# Altium PCB 电机驱动板-V5.0.PcbDoc (part 3 of 3)
Units mil, origin at the board's own origin, x right, y up, seen from the top; angles counter-clockwise.
Board outline 4724.41 x 4330.71 mil, 4 copper layers (Top Layer, NET-A, GND-A, Bottom Layer); 312 components, 201 nets, 977 pads, 515 vias.
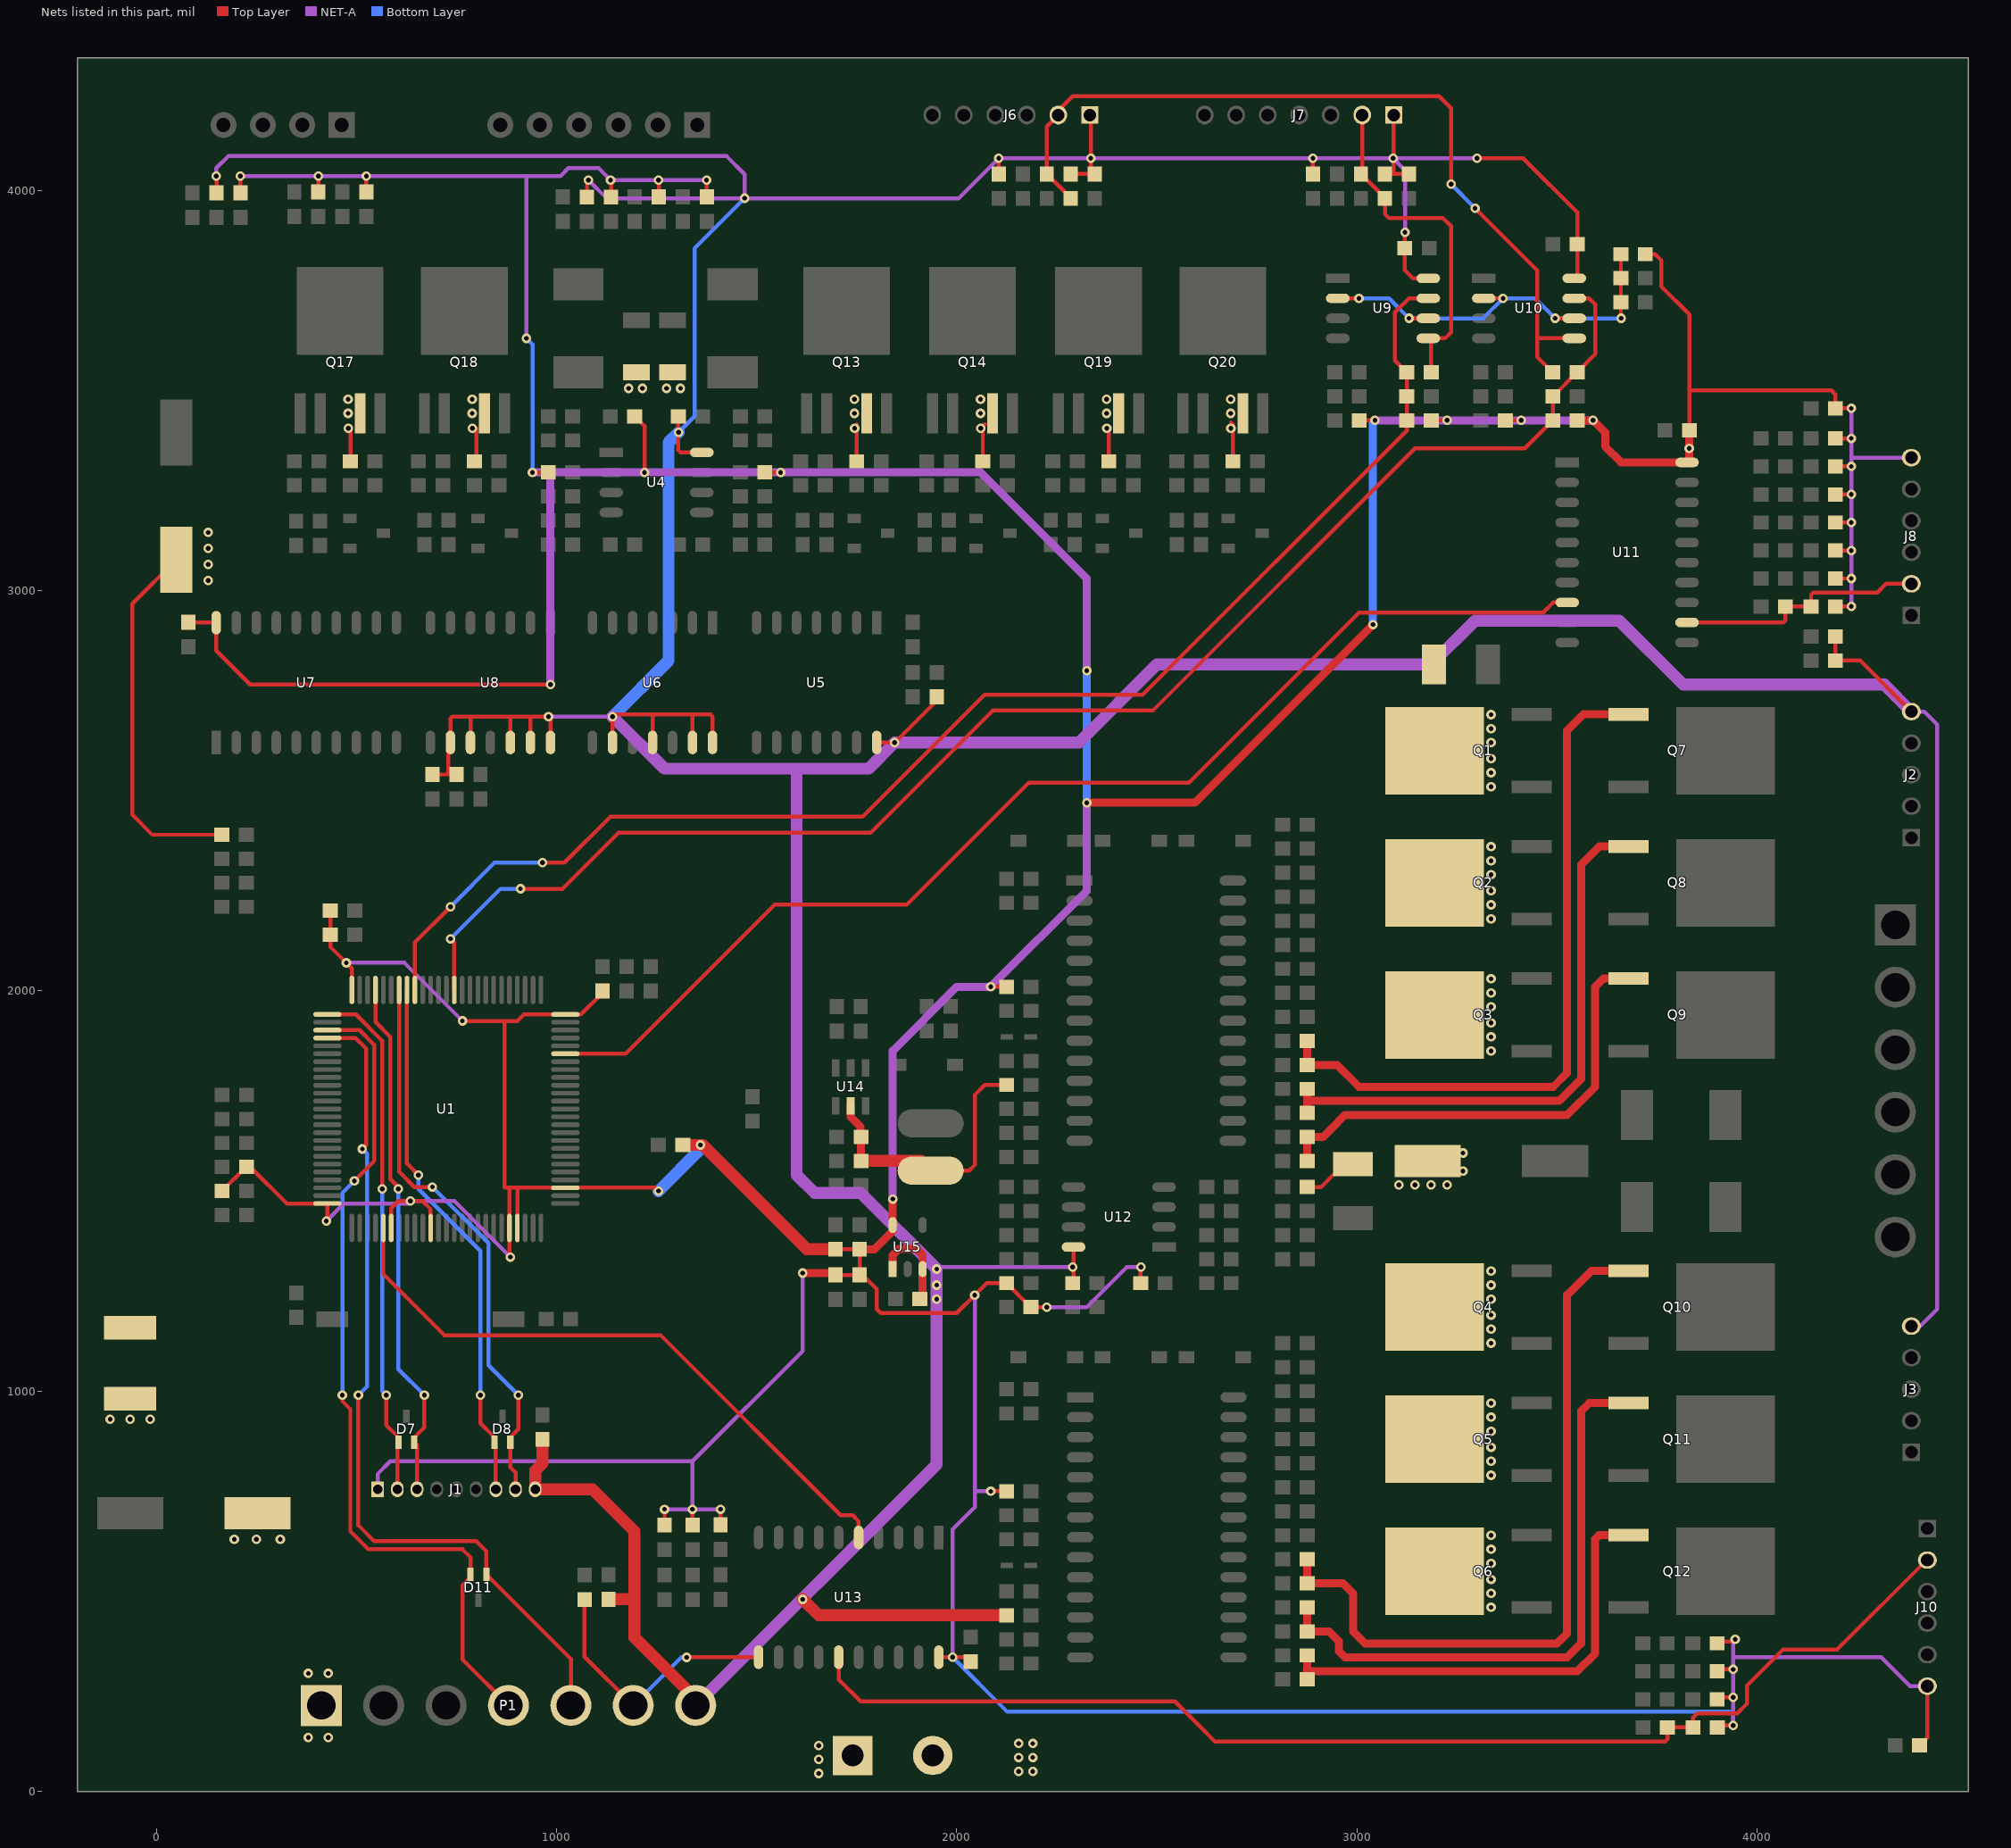
[diagram p5: the nets of this part, all layers, seen from the top]

## Via types
v1: diameter 23.62, hole 11.81, Top Layer to Bottom Layer, tented both sides, 513 vias
v2: diameter 23.62, hole 11.81, Top Layer to Bottom Layer, 2 vias

## Nets (pads, with @x,y where several pads share a name; then routed paths per layer and width w, separated by ;. In a path a pad name is that pad's centre, name@x,y a point inside that pad or via, vN(x,y) a via of type N, cw(c..) or ccw(c..) an arc to the next point about the centre after c; other vN are vias at no path point) (continued)
PWM-LO1-L: Q7.1 R18.1 R28.1 | length 1797.5
  Top Layer w20: R28.1@2875.51,1875 R18.1@2875.51,1815 2950,1815 3005,1760 3085,1760 ; 3060,1760 3490,1760 3525,1795 3525,2650 3565.55,2690.55 Q7.1@3678.94,2690.55
PWM-LO1-R: Q10.1 R21.1 R29.1 | length 1889.9
  Top Layer w20: R29.1@2875.51,580 R21.1@2875.51,520 2965,520 2990,495 2990,400 3020,370 3500,370 3525,395 ; 3505,375 3525,395 ; Q10.1@3678.94,1300.55 3585.55,1300.55 3525,1240 3525,1185 3525,395
PWM-LO2-L: Q8.1 R19.2 R32.1 | length 1430.6
  Top Layer w20: R32.1@2875.51,1695 R19.2@2875.51,1755 ; 2885,1725 3505,1725 3560,1780 3560,2315 3605.55,2360.55 Q8.1@3678.94,2360.55
PWM-LO2-R: Q11.1 R22.1 R33.1 | length 1513
  Top Layer w20: R22.1@2875.54,460 R33.1@2875.54,400 2930,400 2955,375 2955,350 2970,335 3005,335 ; 3000,335 3525,335 3560,370 3560,950 3580.55,970.55 Q11.1@3678.94,970.55
PWM-LO3-L: Q9.1 R20.2 R36.1 | length 1173.7
  Top Layer w20: R36.1@2875.51,1575 R20.2@2875.51,1635 2915,1635 2935,1655 2970,1690 3525,1690 3595,1760 3595,2010 3615.55,2030.55 Q9.1@3678.94,2030.55
PWM-LO3-R: Q12.1 R23.1 R37.1 | length 1171.9
  Top Layer w20: 2875,300 3550,300 3595,345 3595,630 3605.55,640.55 Q12.1@3678.94,640.55 ; R37.1@2875.51,280 R23.1@2875.51,340
REF-WING: C52.1 R67.1 R69.2 U9.2 U9.6 U10.2 U10.6 | length 1103.8
  Top Layer w10: U9.2@2951.94,3730 v1(3005,3730) ; v1(3130,3680) U9.6@3178.06,3680 ; U10.2@3316.94,3730 v1(3365,3730) ; v1@3493.06,3680 v1(3495,3680) U10.6@3540,3680 ; v1@3659.49,3684.49 R69.2@3659.49,3720 C52.1@3659.49,3780 R67.1@3659.49,3840
  Bottom Layer w10: v1(3005,3730) 3080,3730 v1(3130,3680) 3230,3680 ; 3265,3680 3230,3680 ; v1(3660,3680) v1(3495,3680) 3445,3730 v1(3365,3730) 3315,3680 3230,3680
STOP-BLDC: P1.6 R134.2 U13.11 | length 694.8
  Top Layer w10: R134.2@1070,479.49 1070,336.81 P1.6@1191.81,215 P1.6@1191.81,198.19 ; v1(1325,335) 1325.39,335.39 U13.11@1505,335.39
  Bottom Layer w10: P1.6@1191.81,215 1311.81,335 v1(1325,335)
SWCLK: D7.1 J1.2 U1.76 | length 1302.6
  Top Layer w10: U1.76@427.76,1941.22 498.78,1941.22 565,1875 v1(565,1505) ; v1(575,990) 575,915 605.31,884.69 D7.1@605.31,872.52 602.36,869.57 J1.2@602.36,755
  Bottom Layer w10: v1(565,1505) 565,1395 565,1000 v1(575,990)
SWDIO-103: D7.2 J1.3 U1.72 | length 1311.2
  Top Layer w10: U1.72@547.83,2002.24 547.83,1922.17 585,1885 585,1530 605,1510 v1(605,1505) ; J1.3@651.57,755 651.57,865.63 D7.2@644.68,872.52 644.68,884.68 670,910 v1(670,990)
  Bottom Layer w10: v1(605,1505) 605,1055 v1(670,990)
UART1-RX: D8.2 J1.8 U1.69 | length 1410.9
  Top Layer w10: U1.69@606.89,2002.24 606.89,1548.11 645,1510 v1(690,1510) ; J1.8@897.64,755 897.64,797.36 885,810 885,872.2 D8.2@884.68,872.52 884.68,884.68 905,905 v1(905,990)
  Bottom Layer w10: v1(690,1510) 830,1370 830,1065 v1(905,990)
UART1-TX: D8.1 J1.7 U1.68 | length 1339.1
  Top Layer w10: U1.68@626.57,2002.24 626.57,1568.43 v1(655,1540) ; v1(810,990) 810,920 845.31,884.69 D8.1@845.31,872.52 848.43,869.41 J1.7@848.43,755
  Bottom Layer w10: v1(655,1540) 655,1505 810,1350 v1(810,990)
UART4-RX: D11.1 P1.5 U1.79 | length 2135.8
  Top Layer w10: U1.79@427.76,1882.17 497.83,1882.17 525,1855 525,1615 v1(515,1605) ; v1(505,990) 505,665 545,625 800,625 824.69,600.31 D11.1@824.69,542.48 1035.91,331.26 P1.5@1035.91,215
  Bottom Layer w10: v1(505,990) 526.81,1011.81 526.81,1593.19 v1(515,1605)
UART4-TX: D11.2 P1.4 U1.78 | length 2152
  Top Layer w10: U1.78@427.76,1901.85 508.15,1901.85 545,1865 545,1835 ; v1(465,990) 465,975 485,955 485,650 530,605 765,605 785.32,584.68 D11.2@785.32,542.48 785.32,535.32 765,515 765,330 P1.4@880,215 ; v1(495,1525) 545,1575 545,1845
  Bottom Layer w10: v1(465,990) 465,1495 v1(495,1525)
VCC-3.3V-MD: C19.1 C32.2 C33.2 C34.2 C35.2 C37.2 C43.1 C44.2 C56.1 C68.1 C71.1 C79.1 C89.1 C90.1 C91.1 J1.1 J8.6 J10.6 R11.2 R39.2 R44.2 R45.2 R46.2 R47.2 R48.2 R49.2 R58.2 R59.2 R61.1 R62.1 R63.1 R64.1 R65.1 R66.1 R67.2 R72.1 R73.1 R74.1 R75.1 R76.1 R77.1 R78.1 R82.2 R83.2 R84.2 R85.2 R90.2 R91.2 R146.2 R148.1 R151.2 U1.6 U1.11 U1.21 U1.22 U1.28 U1.50 U1.75 U1.100 U7.20 U11.20 U13.20 U15.5 | length 23033.3
  Top Layer w10: C44.2@80,2920.51 149.09,2920.51 U7.20@150,2919.61 150,2850 235,2765 v1(985,2765) ; R48.2@164.49,1500 224.49,1560 C33.2@225.51,1560 235,1560 326.22,1468.78 U1.100@427.76,1468.78 427.76,1427.76 v1(425,1425) ; v1(210,4035) 210.68,4034.32 R59.2@210.68,3993.31 ; R44.2@405,3995.51 v1(405,4035) ; C34.2@421.73,2153.27 C34.2@435,2140 ; C37.2@435,2200 C34.2@435,2140 ; U1.75@488.78,2002.24 488.78,2056.22 v1(475,2070) 435,2110 C34.2@435,2140 ; R45.2@525,3995.51 v1(525,4035) ; U1.6@587.2,1407.76 587.2,1457.2 605,1475 v1(635,1475) 665,1475 685.63,1454.37 U1.11@685.63,1407.76 ; v1(765,1925) 870,1925 ; 870,1508.15 918.15,1508.15 U1.28@1022.24,1508.15 1246.85,1508.15 v1(1255,1500) ; 870,1509.96 870,1610 ; 870,1585 870,1610 ; 880,1508.15 882.48,1505.67 U1.21@882.48,1407.76 882.48,1337.52 v1(885,1335) ; U1.22@902.17,1407.76 902.17,1508.15 ; v1(940,3295) R39.2@979.49,3295 ; C35.2@1115,1999.49 1115,1995 1061.22,1941.22 U1.50@1022.24,1941.22 918.65,1941.22 902.43,1925 870,1925 ; R58.2@1136.27,3982.84 v1@1136.27,4023.73 ; C19.1@1195.51,3435 1220,3410.51 v1(1220,3295) ; R47.2@1255.68,3983.31 v1@1255.68,4024.32 ; R75.1@1270,665.51 v1(1270,705) ; R76.1@1340,665.51 v1(1340,705) ; v1(1375,4025) 1375.68,4024.32 R46.2@1375.68,3983.31 ; R77.1@1410,666.02 1409.49,665.51 1409.49,704.49 v1(1410,705) ; R49.2@1520.51,3295 v1(1560,3295) ; C91.1@1697.4,1290.51 R146.2@1757.4,1290.51 ; C90.1@1697.4,1354.49 C89.1@1757.4,1354.49 R146.2@1757.4,1290.51 ; U15.5@1840,1400 U15.5@1840,1415 ; U13.20@1955,335.39 v1(1990,335.39) C79.1@2034.09,335.39 ; v1(2085,750) R151.2@2124.49,750 ; v1(2085,2010) R11.2@2124.49,2010 ; v1(2225,1210) C68.1@2185.51,1210 2184.49,1210 R91.2@2124.49,1270 2075,1270 v1(2045,1240) 2000,1195 1810,1195 1800,1205 1800,1255 1764.49,1290.51 R146.2@1757.4,1290.51 ; R90.2@2459.49,1270 2459.49,1309.49 v1(2460,1310) ; R82.2@3005.51,3425 v1(3045,3425) ; R83.2@3185.51,3425 v1(3225,3425) ; R84.2@3370.51,3425 v1(3410,3425) ; 3700,3320 U11.20@3810,3320 ; R67.2@3720.51,3840 3745,3840 3760,3825 3760,3760 3830.51,3689.49 3830.51,3500 ; U11.20@3824.61,3320 U11.20@3830.51,3325.91 ; C71.1@3830.51,3400 3830.51,3500 ; R78.1@3900,165 v1@3939.49,165 ; R74.1@3900,235 v1(3940,235) ; R73.1@3900,305 v1(3940,305) ; R72.1@3900,370 3905,375 3940,375 v1(3945,380) ; R148.1@4195.51,2960 v1@4230,2960 ; R66.1@4195.51,3030 v1@4230,3030 ; R65.1@4195.51,3100 v1@4230,3100 ; R64.1@4195.51,3170 v1@4230,3170 ; R63.1@4195.51,3240 v1(4235,3240) ; R62.1@4195.51,3310 v1(4235,3310) ; R61.1@4195.51,3380 v1(4235,3380) ; v1(4235,3455) C43.1@4195.51,3455 4195.51,3489.49 4185,3500 3830.51,3500 ; C56.1@4405.51,115 4425,134.49 J10.6@4425,263.15 ; 870,1610 870,1925
  Top Layer w20: v1(1615,1295) 1692.91,1295 C91.1@1697.4,1290.51 ; C89.1@1757.4,1354.49 1794.49,1354.49 U15.5@1840,1400 ; U15.5@1840,1415 v1(1840,1480) ; v1(2325,2470) 2595,2470 v2(3040,2915) ; R85.2@3550.51,3425 v1(3590,3425) 3620,3395 3620,3360 3660,3320 3810,3320 3680,3320 ; U11.20@3830.51,3325.91 C71.1@3830.51,3400
  Top Layer w30: C32.2@1325,1615 v1(1360,1615) 1365,1615 1625.51,1354.49 C90.1@1697.4,1354.49
  NET-A w10: v1(210,4035) v1(405,4035) v1(525,4035) 925,4035 ; v1(425,1425) 468.78,1468.78 628.78,1468.78 v1(635,1475) 745,1475 v1(885,1335) ; v1(475,2070) 620,2070 v1(765,1925) ; J1.1@553.15,755 553.15,793.15 585,825 1340,825 ; v1(925,3630) 925,4035 ; v1(1270,705) v1(1340,705) ; v1(1375,4025) v1(1255,4025) v1(1135,4025) 1105,4055 1030,4055 1010,4035 925,4035 ; v1(1410,705) v1(1340,705) ; v1(1615,1295) 1615,1100 1340,825 ; v1(1990,335.39) 1990,655 2045,710 2045,750 ; v1(2045,1240) 2045,750 ; v1(2085,750) 2045,750 ; v1(2225,1210) 2325,1210 2425,1310 v1(2460,1310) ; v1(3940,165) v1(3940,235) v1(3940,305) 3940,335 ; v1(3945,380) 3940,375 3940,335 ; v1(4235,2960) v1(4235,3030) v1(4235,3100) v1(4235,3170) v1(4235,3240) v1(4235,3310) 4235,3330 ; v1(4235,3455) v1(4235,3380) 4235,3330 ; J8.6@4385,3331.85 4236.85,3331.85 4235,3330 ; J10.6@4425,263.15 4381.85,263.15 4310,335 3940,335 ; v1(1340,705) 1340,825
  NET-A w20: v1(940,3295) 985,3295 ; v1(985,2765) 985,3295 ; v1(1840,1480) 1840,1850 2000,2010 v1(2085,2010) 2325,2250 v1(2325,2470) ; v1(2325,2800) 2325,3030 2060,3295 v1(1560,3295) v1(1220,3295) 985,3295 ; v1(3045,3425) v1(3225,3425) v1(3410,3425) v1(3590,3425)
  Bottom Layer w10: v1(925,3630) 940,3615 v1(940,3295) ; v1(1990,335.39) 2125.39,200 3940,200 v1(3940,165) ; v1@3940,375 v1(3945,380)
  Bottom Layer w20: v1(2325,2470) v1(2325,2800) ; v2(3040,2915) 3040,3420 v1(3045,3425)
  Bottom Layer w30: v1(1255,1500) 1360,1605 v1(1360,1615)
  other v1: 3830,3355
VCC-5V-MD: C7.2 C20.2 C21.1 C22.2 C38.1 C39.1 C42.2 C57.2 C65.2 C66.2 C67.2 C75.1 C76.1 C82.1 C88.2 J1.9 J2.5 J3.5 J6.1 J7.1 L1.1 P1.7 R13.1 R40.2 R41.2 R42.2 R43.2 R56.2 R57.2 R113.1 R152.1 U4.8 U5.14 U6.9 U6.11 U6.13 U6.14 U8.9 U8.10 U8.12 U8.13 U8.14 U9.8 U10.8 U12.8 U14.5 U15.1 U15.3 | length 19500.7
  Top Layer w10: v1(150,4035) 150.68,4034.32 R57.2@150.68,3993.31 ; C67.2@690,2540.51 730,2540.51 ; C76.1@750,2540.51 730,2540.51 ; U8.10@785,2620.39 785,2685 ; U8.12@885,2620.39 885,2685 ; U8.13@935,2620.39 935,2685 ; U8.14@980,2615.39 U8.14@985,2620.39 985,2680 v1(980,2685) 935,2685 ; R56.2@1076.27,3982.84 1076.27,4021.27 v1(1080,4025) ; U6.9@1140,2620.39 v1(1140,2685) 1145,2690 1240,2690 ; U6.11@1240,2620.39 1240,2690 ; C21.1@1304.49,3435 1304.49,3350.51 1310,3345 U4.8@1363.06,3345 ; U6.13@1340,2620.39 1340,2690 ; U6.14@1390,2620.39 1390,2685 1385,2690 1340,2690 ; R113.1@1760,1636.02 R113.1@1761.02,1635 ; U5.14@1800,2620.39 1845.39,2620.39 1950,2725 C42.2@1950,2734.49 ; C88.2@1907.91,1230 C88.2@1914.8,1236.89 ; L1.1@1910.95,1575 L1.1@1935,1550.95 2030.95,1550.95 2045,1565 2045,1740 2070,1765 R152.1@2124.49,1765 ; U15.3@1914.8,1305 U15.3@1915,1305.2 ; R41.2@2105,4040.51 v1(2105,4080) ; R40.2@2285,4040.51 C38.1@2345,4040.51 C38.1@2335,4050.51 ; C75.1@2289.49,1270 2291.94,1272.46 U12.8@2291.94,1360 ; J6.1@2332.53,4187.8 2335,4185.33 v1(2335,4080) C38.1@2335,4040.51 ; R43.2@2890,4040.51 v1(2890,4080) ; R42.2@3070,4040.51 3090,4040.51 ; J7.1@3091.9,4187.8 3091.9,4042.41 3090,4040.51 ; v1@3120,3900 3119.49,3899.49 C65.2@3119.49,3855 3119.49,3800.51 3140,3780 U9.8@3178.06,3780 ; C39.1@3130,4040.51 3090,4040.51 ; v1(3300,4080) 3415,4080 3550.51,3944.49 C66.2@3550.51,3865 3550.51,3787.46 U10.8@3543.06,3780 ; C20.2@4195,2824.49 C20.2@4195.51,2825 ; C22.2@4195.51,2885 C20.2@4195.51,2825 ; J2.5@4385,2697.48 4257.48,2825 C20.2@4195.51,2825 ; 730,2540.51 730,2615.39 U8.9@735,2620.39 735,2680 740,2685 785,2685 ; 785,2685 885,2685 ; 885,2685 935,2685 ; 1240,2690 1340,2690
  Top Layer w20: U14.5@1735,1712.76 1735,1685 1760,1660 R113.1@1760,1636.02 ; C82.1@1761.02,1575 R113.1@1761.02,1635 ; U15.1@1840,1305 1840,1340 1855,1355 1900,1355 1915,1340 U15.3@1915,1305.2 ; C88.2@1914.8,1236.89 U15.3@1914.8,1305
  Top Layer w30: C7.2@965,870 965,820 946.85,801.85 J1.9@946.85,755 1090,755 1195,650 1195,480 ; C57.2@1130,480 1195,480 ; P1.7@1347.72,215 1347.72,232.28 1195,385 1195,480 ; v1(1615,480) 1655,440 R13.1@2124.49,440 ; C82.1@1761.02,1575 L1.1@1910.95,1575
  NET-A w10: v1(150,4035) 150,4055 180,4085 1425,4085 1470,4040 v1(1470,3980) ; v1(980,2685) v1(1140,2685) ; v1(1080,4025) 1125,3980 v1(1470,3980) ; v1(1950,1305) 1955,1310 v1(2290,1310) ; v1(3120,3895) 3120,4050 v1(3090,4080) ; v1(3300,4080) v1(3090,4080) ; J3.5@4385,1162.48 4407.48,1162.48 4450,1205 4450,2665 4417.52,2697.48 J2.5@4385,2697.48 ; v1(1470,3980) 2005,3980 v1(2105,4080) v1(2335,4080) v1(2890,4080) v1(3090,4080)
  NET-A w30: v1(1140,2685) 1270,2555 1600,2555 ; P1.7@1347.72,215 1950,817.28 v1(1950,1230) v1(1950,1265) v1(1950,1305) 1760,1495 1645,1495 1600,1540 1600,2555 ; 4150,2765 4130,2765 ; J2.5@4385,2697.48 4317.48,2765 4130,2765 ; 1600,2555 1780,2555 v1(1845,2620) 2305,2620 2500,2815 3185,2815 3295,2925 3655,2925 3815,2765 4130,2765
  Bottom Layer w10: v1(1305,3395) 1345,3435 1345,3855 v1(1470,3980)
  Bottom Layer w30: v1(1140,2685) 1280,2825 1280,3370 v1(1305,3395)
VCC-24V-HW: C53.1 C72.2 C80.2 F2.2 Q13.3 Q14.3 Q17.3 Q18.3 Q19.3 Q20.3 R88.2 R89.2 R110.1 R111.1 R112.1 R115.2 R116.2 | length 1691.9
  Top Layer w10: C53.1@50,3077 -60,2967 -60,2440 -10,2390 R110.1@163.98,2390 ; R111.1@485.16,3322.8 v1@485.16,3410 ; Q17.3@509.38,3404.38 Q17.3@509.38,3442.66 ; R112.1@795.16,3322.8 800,3327.64 v1@800,3405 ; Q18.3@819.97,3404.97 Q18.3@819.97,3442.66 ; v1@1750,3415 1750,3322.97 R88.2@1750.16,3322.8 ; Q13.3@1774.97,3409.97 Q13.3@1774.97,3442.66 ; R89.2@2065.16,3322.8 2065,3322.97 2065,3410 2070,3415 ; Q14.3@2089.38,3404.38 Q14.3@2089.38,3442.66 ; v1(2375,3405) 2380,3400 2380,3322.97 R115.2@2380.16,3322.8 ; Q19.3@2404.38,3404.38 Q19.3@2404.38,3442.66 ; 2685,3420 2690.16,3414.84 R116.2@2690.16,3322.8 ; Q20.3@2714.97,3404.97 Q20.3@2714.97,3442.66
  other v1: 130,3025 130,3065 130,3105 130,3145 480,3405 790,3405 1745,3405 2060,3405 2685,3405 479.44,3442.56 789.44,3442.56 1744.44,3442.56 2059.44,3442.56 2374.44,3442.56 2684.44,3442.56 479.44,3477.56 789.44,3477.56 1744.44,3477.56 2059.44,3477.56 2374.44,3477.56 2684.44,3477.56 1180,3505 1215,3505 1275,3505 1310,3505
VCC-24V-MD: C54.1 C92.2 C93.2 F1.2 Q1.3 Q2.3 Q3.3 Q4.3 Q5.3 Q6.3 R68.1 | length 147.6
  Top Layer w10: R68.1@2875.51,1510 2910,1510 C92.2@2955,1555 ; v1@3100,1510 v1(3105,1515) ; C54.1@3127,1545 C54.1@3157,1575
  other v1: 2155,50 2190,50 2155,85 2190,85 2155,120 2190,120 3335,460 3335,495 3335,530 3335,570 3335,605 3335,640 3335,790 3335,825 3335,860 3335,900 3335,935 3335,970 3335,1120 3335,1155 3335,1190 3335,1230 3335,1265 3335,1300 3145,1515 3185,1515 3225,1515 3265,1550 3265,1595 3335,1850 3335,1885 3335,1920 3335,1960 3335,1995 3335,2030 3335,2180 3335,2215 3335,2250 3335,2290 3335,2325 3335,2360 3335,2510 3335,2545 3335,2580 3335,2620 3335,2655 3335,2690
VCC-BATT-BLDC: C86.1 F1.1 F2.1 P1.1
  other v1: 1655,45 1655,80 1655,115 380,135 430,135 380,295 430,295 195,630 250,630 310,630 -115,930 -65,930 -15,930
W_IO_L: C74.1 R85.1 R93.1 U1.62 U10.7 | length 3847.8
  Top Layer w10: v1(735,2130) 744.68,2120.32 U1.62@744.68,2002.24 ; v1(910,2255) 1015,2255 1155,2395 1225,2395 ; 1195,2395 1225,2395 ; U10.7@3543.06,3730 3580,3730 3595,3715 3595,3590 3555,3550 R93.1@3555,3540 ; R93.1@3550,3545 3490,3485 C74.1@3489.49,3485 R85.1@3489.49,3425 3419.49,3355 3145,3355 2490,2700 2090,2700 1785,2395 1225,2395
  Bottom Layer w10: v1(735,2130) 860,2255 v1(910,2255)
W_IO_L1: C23.1 J6.2 R40.1 R93.2 U10.5 | length 2123
  Top Layer w10: R40.1@2285,3979.49 2285,3980.51 C23.1@2225,4040.51 2225,4159.01 J6.2@2253.79,4187.8 2253.79,4198.79 2290,4235 3205,4235 3235,4205 v1(3235,4015) ; v1(3295,3955) 3450,3800 3450,3630 ; R93.2@3488.98,3545 3450,3583.98 3450,3630 ; U10.5@3543.06,3630 3450,3630
  Bottom Layer w10: v1(3235,4015) v1(3295,3955)
W_IO_R: C73.1 R83.1 R92.1 U1.67 U9.7 | length 3546.8
  Top Layer w10: U1.67@646.26,2002.24 646.26,2121.26 v1(735,2210) ; v1(965,2320) 1020,2320 1135,2435 1765,2435 2070,2740 2465,2740 3124.49,3399.49 R83.1@3124.49,3425 ; R83.1@3135,3414.49 R83.1@3124.49,3425 ; U9.7@3178.06,3730 3130,3730 3095,3695 3095,3574.49 R92.1@3124.49,3545 C73.1@3124.49,3485 R83.1@3124.49,3425
  Bottom Layer w10: v1(735,2210) 845,2320 v1(965,2320)
W_IO_R1: C25.1 J7.2 R42.1 R92.2 U9.5 | length 867.6
  Top Layer w10: J7.2@3013.16,4187.8 3013.16,4043.67 C25.1@3010,4040.51 3070,3980.51 R42.1@3070,3979.49 3070,3940 3080,3930 3215,3930 3235,3910 3235,3645 3220,3630 U9.5@3178.06,3630 3185.51,3622.54 R92.2@3185.51,3545
WHEEL-FLOAT-L: C51.1 J8.2 R148.2 U11.12 | length 638
  Top Layer w10: U11.12@3824.61,2920 4065,2920 4070,2925 4070,2959.49 C51.1@4070.51,2960 R148.2@4134.49,2960 4134.49,2989.49 4140,2995 4300,2995 4321.89,3016.89 J8.2@4385,3016.89
WHEEL-FLOAT-L1: U1.45 U11.8 | length 2970.1
  Top Layer w10: U1.45@1022.24,1842.8 1172.8,1842.8 1545,2215 1875,2215 2180,2520 2580,2520 3005,2945 3465,2945 3490,2970 U11.8@3525.39,2970
WHEEL-FLOAT-R: C64.1 J10.2 R78.2 U13.15 | length 3140.8
  Top Layer w10: U13.15@1705,335.39 1705,280 1760,225 1880,225 ; 1855,225 1880,225 ; 2614.85,155 2607.43,162.43 ; 4070,355 4090,355 ; J10.2@4425,578.11 4423.11,578.11 4200,355 4090,355 ; 1880,225 2544.85,225 2607.43,162.43 ; 2607.43,162.43 2644.85,125 3770,125 3775.51,130.51 C64.1@3775.51,160 R78.2@3839.49,160 3840,160.51 3840,185 3850,195 3950,195 3975,220 3975,265 4065,355 4090,355
WHEEL-FLOAT-R1: U1.5 U13.5 | length 1623.9
  Top Layer w10: U1.5@567.52,1407.76 567.52,1292.48 720,1140 1230,1140 ; 1215,1140 1230,1140 ; 1240,1140 1230,1140 ; U13.5@1755,634.61 1755,675 1740,690 1710,690 1260,1140 1230,1140
pads on no net: J1.4 J1.5 J7.5 U1.2 U1.3 U1.9 U1.34 U1.51 U1.52 U1.73 U1.82 U1.83 U1.84 U1.85 U1.86 U1.87 U1.88 U1.89 U1.95 U1.96 U1.97 U1.98 U2.17 U2.21 U2.25 U3.17 U3.21 U3.25 U6.8 U6.10 U6.12 U7.6 U7.7 U7.8 U7.9 U8.8 U8.11 U11.9 U14.6 U15.4
copper on no net: | length 2968.4
  Bottom Layer w7.87: 314.96,196.85 ccw(c196.85,196.85) 314.96,196.85 ; 314.96,3740.16 ccw(c196.85,3740.16) 314.96,3740.16 ; 4251.97,196.85 ccw(c4133.86,196.85) 4251.97,196.85 ; 4251.97,3740.16 ccw(c4133.86,3740.16) 4251.97,3740.16

## Polygon pours and split planes (outlines as drawn)
GND on Top Layer "Top Layer-No Net" (solid, remove dead copper, pour order 1001): 2010,-245 4600,-245 4870,25 4870,4335 4670,4535 4550,4655 3355,4655 -455,4655 -850,4260 -400,3810 -400,-275
MOT-L-B on Top Layer "Top Layer-No Net" (solid, remove dead copper, pour order 1000): 3385,2695 3385,2730 3400,2745 3460,2805 3695,2805 4000,2805 4025,2780 4050,2755 4050,2695 3835,2695 3800,2695 3785,2710 3755,2740 3740,2740 3560,2740 3545,2725 3490,2670 3385,2670
NetD12_1 on Top Layer "Top Layer-No Net" (solid, remove dead copper, pour order 1007): 1775,1785 1800,1785 1820,1765 1855,1730 1855,1670 1945,1670 1945,1700 1930,1715 1900,1745 1900,1805 1900,1830 1895,1835 1890,1840 1870,1840 1770,1840 1765,1835 1765,1785
VCC-5V-MD on Top Layer "Top Layer-No Net" (solid, remove dead copper, pour order 1003): 1925,1215 1980,1215 1990,1225 1990,1265 1990,1510 2000,1520 2010,1530 2010,1550 1970,1550 1960,1540 1950,1530 1950,1380 1935,1365 1895,1365 1895,1360 1900,1355 1915,1340 1915,1237.09 1914.8,1236.89
COM-R on Top Layer "Top Layer-No Net" (solid, remove dead copper, pour order 1004): 3625,480 3625,440 3625,435 3645,435 3765,435 3775,435 3780,440 3780,455 3780,1520 3775,1525 3755,1525 3630,1525 3625,1520 3625,1500 3625,1350 3630,1345 3665,1345 3745,1345 3750,1340 3750,1320 3750,1185 3745,1180 3715,1180 3630,1180 3625,1175 3625,1165 3625,1065 3630,1060 3745,1060 3750,1055 3750,855 3745,850 3720,850 3630,850 3625,845 3625,745 3630,740 3660,740 3745,740 3750,735 3750,525 3745,520 3630,520 3625,515
COM-L on Top Layer "Top Layer-No Net" (solid, remove dead copper, pour order 1005): 3625,2525 3625,2555 3630,2560 3775,2560 3780,2555 3780,2540 3780,1630 3775,1625 3740,1625 3630,1625 3625,1630 3625,1905 3630,1910 3745,1910 3750,1915 3750,1925 3750,2115 3745,2120 3630,2120 3625,2125 3625,2160 3625,2230 3630,2235 3705,2235 3745,2235 3750,2240 3750,2255 3750,2450 3745,2455 3720,2455 3630,2455 3625,2460
VCC-24V-MD on Top Layer "Top Layer-No Net" (solid, remove dead copper, pour order 1006): 1875,95 1875,40 1885,30 2200,30 2210,40 2210,125 2210,135 2200,145 1880,145 1875,140
VCC-24V-MD on Top Layer "Top Layer-No Net" (solid, remove dead copper, pour order 1008): 3070,440 3340,440 3355,455 3360,460 3360,475 3360,645 3345,660 3290,660 3070,660
VCC-24V-MD on Top Layer "Top Layer-No Net" (solid, remove dead copper, pour order 1009): 3070,770 3340,770 3355,785 3360,790 3360,805 3360,975 3345,990 3290,990 3070,990
VCC-24V-MD on Top Layer "Top Layer-No Net" (solid, remove dead copper, pour order 1010): 3070,1100 3340,1100 3355,1115 3360,1120 3360,1135 3360,1305 3345,1320 3290,1320 3070,1320
VCC-24V-MD on Top Layer "Top Layer-No Net" (solid, remove dead copper, pour order 1011): 3070,1830 3340,1830 3355,1845 3360,1850 3360,1865 3360,2035 3345,2050 3290,2050 3070,2050
VCC-24V-MD on Top Layer "Top Layer-No Net" (solid, remove dead copper, pour order 1012): 3070,2160 3340,2160 3355,2175 3360,2180 3360,2195 3360,2365 3345,2380 3290,2380 3070,2380
VCC-24V-MD on Top Layer "Top Layer-No Net" (solid, remove dead copper, pour order 1013): 3070,2490 3340,2490 3355,2505 3360,2510 3360,2525 3360,2695 3345,2710 3290,2710 3070,2710
VCC-24V-MD on Top Layer "Top Layer-No Net" (solid, remove dead copper, pour order 1014): 3090,1550 3090,1505 3100,1495 3295,1495 3305,1505 3305,1625 3295,1635 3100,1635 3090,1625
MOT-L-Y on Top Layer "Top Layer-No Net" (solid, remove dead copper, pour order 1015): 3800,1865 3800,1815 3800,1810 3810,1800 4380,1800 4400,1820 4405,1825 4405,1855 4405,1900 4395,1910 4390,1915 4295,1915 4095,1915 4070,1940 4050,1960 4050,2050 4050,2070 4030,2090 4020,2100 4000,2100 3810,2100 3800,2090
MOT-L-G on Top Layer "Top Layer-No Net" (solid, remove dead copper, pour order 1016): 3800,2195 3800,2150 3810,2140 4045,2140 4065,2120 4090,2095 4090,2060 4090,1980 4105,1965 4115,1955 4230,1955 4390,1955 4405,1970 4405,2055 4390,2070 4260,2070 4245,2085 4245,2175 4175,2245 4050,2370 4050,2385 4050,2395 4015,2430 3810,2430 3800,2420
MOT-L-B on Top Layer "Top Layer-No Net" (solid, remove dead copper, pour order 1017): 3800,2540 3800,2475 3810,2465 4035,2465 4075,2425 4085,2415 4085,2395 4105,2375 4285,2195 4285,2175 4285,2110 4290,2105 4295,2100 4310,2100 4395,2100 4405,2110 4405,2135 4405,2280 4370,2315 4050,2635 4050,2685 4050,2715 4040,2725 3805.6,2725 3800.3,2719.7
MOT-R-B on Top Layer "Top Layer-No Net" (solid, remove dead copper, pour order 1018): 3800,1285 3800,1345 3810,1355 3845,1355 3980,1355 3995,1370 4000,1375 4000,1435 4000,1685 4000,1735 4020,1755 4025,1760 4070,1760 4390,1760 4400,1750 4405,1745 4405,1735 4405,1650 4395,1640 4350,1640 4130,1640 4120,1630 4115,1625 4115,1530 4115,1160 4055,1100 3800,1100
MOT-R-G on Top Layer "Top Layer-No Net" (solid, remove dead copper, pour order 1019): 3800,970 3800,1020 3810,1030 3840,1030 4035,1030 4115,1110 4140,1135 4140,1290 4140,1560 4165,1585 4175,1595 4385,1595 4390,1595 4400,1585 4405,1580 4405,1570 4405,1495 4395,1485 4335,1485 4230,1485 4220,1475 4220,1400 4220,995 4065,840 4050,825 4050,795 4050,770 4045,765 3800,765
MOT-R-Y on Top Layer "Top Layer-No Net" (solid, remove dead copper, pour order 1020): 3800,630 3800,685 3815,700 3820,705 3855,705 4030,705 4075,750 4085,760 4085,790 4085,820 4150,885 4250,985 4250,1135 4250,1425 4265,1440 4270,1445 4335,1445 4390,1445 4405,1430 4405,1400 4405,1285 4350,1230 4335,1215 4335,1160 4335,820 4060,545 4050,535 4050,515 4050,445 4045,440 4005,440 3800,440
MOT-W-LB on Top Layer "Top Layer-No Net" (solid, remove dead copper, pour order 1021): 2020,4215 2045,4215 2050,4210 2050,4185 2050,3835 2060,3825 2065,3820 2115,3820 2145,3820 2150,3815 2150,3800 2150,3590 2150,3585 2120,3585 1925,3585 1925,3600 1925,4100 1980,4155 1990,4165 1990,4205 1990,4210 1995,4215
MOT-W-LA on Top Layer "Top Layer-No Net" (solid, remove dead copper, pour order 1022): 1935,4215 1960,4215 1965,4210 1965,4190 1965,4175 1945,4155 1835,4045 1835,3785 1835,3585 1820,3585 1615,3585 1615,3935 1890,4210 1895,4215 1935,4215
MOT-W-RB on Top Layer "Top Layer-No Net" (solid, remove dead copper, pour order 1023): 2670,4200 2670,4210 2675,4215 2690,4215 2715,4215 2720,4215 2725,4210 2725,4195 2725,3825 2735,3815 2775,3815 2780,3810 2780,3800 2780,3585 2760,3585 2555,3585 2555,3595 2555,3820 2640,3905 2670,3935 2670,4200
MOT-W-RA on Top Layer "Top Layer-No Net" (solid, remove dead copper, pour order 1024): 2615,4215 2640,4215 2645,4210 2645,4190 2645,3995 2465,3815 2465,3795 2465,3585 2450,3585 2245,3585 2245,3815 2250,3820 2345,3820 2440,3915 2585,4060 2585,4180 2585,4210 2590,4215
MOT-H-A on Top Layer "Top Layer-No Net" (solid, remove dead copper, pour order 1025): 860,4200 890,4200 895,4195 895,4170 895,4090 820,4015 575,3770 575,3730 575,3585 555,3585 350,3585 350,3610 350,3820 355,3825 360,3830 395,3830 505,3830 675,4000 820,4145 820,4180 820,4195 825,4200
MOT-H-B on Top Layer "Top Layer-No Net" (solid, remove dead copper, pour order 1026): 940,4200 925,4200 920,4195 920,4075 820,3975 660,3815 660,3790 660,3585 880,3585 880,3925 995,4040 995,4195 990,4200
NetQ13_1 on Top Layer "Top Layer-No Net" (solid, remove dead copper, pour order 1027): 1585,3515 1900,3515 1905,3510 1905,3490 1905,3395 1910,3390 1955,3390 1955,3405 1955,3510 1960,3515 2220,3515 2225,3510 2225,3480 2225,3395 2230,3390 2250,3390 2270,3390 2270,3405 2270,3510 2275,3515 2515,3515 2525,3505 2525,3490 2525,3395 2530,3390 2545,3390 2580,3390 2580,3395 2580,3555 2570,3565 2535,3565 1525,3565 1520,3570 1520,3585 1515,3590 1490,3590 1375,3590 1370,3585 1370,3575 1370,3505 1375,3500 1385,3500 1570,3500 1585,3515
NetQ17_1 on Top Layer "Top Layer-No Net" (solid, remove dead copper, pour order 1028): 325,3450 325,3555 335,3565 375,3565 975,3565 980,3570 980,3585 985,3590 1010,3590 1120,3590 1125,3585 1125,3580 1125,3500 1105,3500 940,3500 925,3515 905,3515 690,3515 685,3510 685,3505 685,3390 675,3390 640,3390 630,3400 630,3440 630,3510 625,3515 380,3515 375,3510 375,3500 375,3390 355,3390 335,3390 325,3400
VCC-BATT-BLDC on Top Layer "Top Layer-No Net" (solid, remove dead copper, pour order 1029): 325,195 325,285 100,510 75,535 75,745 75,775 50,800 -50,800 -135,800 -150,815 -150,1015 -145,1020 -140,1025 -100,1025 50,1025 170,1025 185,1010 345,850 345,670 345,570 405,510 495,420 495,215 495,170 520,145 1640,145 1645,140 1700,140 1795,140 1800,135 1800,120 1800,25 1795,20 1775,20 385,20 325,80
VCC-24V-HW on Top Layer "Top Layer-No Net" (solid, remove dead copper, pour order 1030): -40,1115 0,1115 10,1125 10,1235 10,2935 40,2965 65,2990 80,2990 145,2990 155,3000 155,3025 155,3165 150,3170 85,3170 -115,3170 -150,3135 -150,3090 -150,1125 -140,1115
VCC-24V-HW on Top Layer "Top Layer-No Net" (solid, remove dead copper, pour order 1031): 1165,3565 1165,3495 1170,3490 1195,3490 1320,3490 1325,3495 1325,3530 1325,3575 1320,3580 1305,3580 1170,3580 1165,3575
MOT-R-Y on NET-A "Top Layer-No Net" (solid, remove dead copper, pour order 1006): 3385,680 3385,725 3395,735 3430,735 4015,735 4025,725 4025,690 4025,625 4020,620 4015,615 3990,615 3395,615 3385,625
MOT-R-G on NET-A "Top Layer-No Net" (solid, remove dead copper, pour order 1005): 3385,1010 3385,1055 3395,1065 3430,1065 4015,1065 4025,1055 4025,1020 4025,955 4020,950 4015,945 3990,945 3395,945 3385,955
MOT-R-B on NET-A "Top Layer-No Net" (solid, remove dead copper, pour order 1004): 3385,1340 3385,1385 3395,1395 3430,1395 4015,1395 4025,1385 4025,1350 4025,1285 4020,1280 4015,1275 3990,1275 3395,1275 3385,1285
MOT-L-G on NET-A "Top Layer-No Net" (solid, remove dead copper, pour order 1003): 3385,2400 3385,2445 3395,2455 3430,2455 4015,2455 4025,2445 4025,2410 4025,2345 4020,2340 4015,2335 3990,2335 3395,2335 3385,2345
MOT-L-Y on NET-A "Top Layer-No Net" (solid, remove dead copper, pour order 1002): 3390,2070 3390,2115 3400,2125 3435,2125 4020,2125 4030,2115 4030,2080 4030,2015 4025,2010 4020,2005 3995,2005 3400,2005 3390,2015
VCC-BATT-BLDC on NET-A "Top Layer-No Net" (solid, remove dead copper, pour order 1032): 1645,20 385,20 350,55 325,80 325,105 325,285 310,300 75,535 75,650 75,775 60,790 50,800 20,800 -135,800 -150,815 -150,845 -150,1015 -140,1025 -105,1025 170,1025 200,995 345,850 345,820 345,570 430,485 495,420 495,250 495,170 520,145 1640,145 1645,140 1795,140 1800,135 1800,25 1795,20 1785,20
VCC-24V-MD on NET-A "Top Layer-No Net" (solid, remove dead copper, pour order 1033): 3360,2430 3360,2705 3350,2715 3085,2715 3070,2700 3070,240 3030,200 2975,145 2185,145 1880,145 1875,140 1875,40 1885,30 2170,30 3330,30 3360,60 3360,2430
VCC-24V-HW on NET-A "Top Layer-No Net" (solid, remove dead copper, pour order 1034): 60,3060 60,3370 220,3530 270,3580 1245,3580 2690,3580 2720,3550 2725,3545 2725,3445 2725,3365 2710,3350 410,3350 295,3235 265,3205 265,3050 265,3020 245,3000 235,2990 140,2990 80,2990 65,3005 60,3010 60,3090
GND on GND-A "Top Layer-No Net" (solid, remove dead copper, pour order 1007): -405,4580 4665,4580 4840,4405 4840,-115 4640,-315 4590,-265 -610,-265
GND on Bottom Layer "Top Layer-No Net" (solid, remove dead copper, pour order 1010): -285,4720 4620,4720 5415,3925 5415,1545 5415,350 4640,-425 -445,-425 -695,-175
COM-L on Bottom Layer "Top Layer-No Net" (solid, remove dead copper, pour order 1009): 3625,2540 3625,2555 3630,2560 3675,2560 3775,2560 3780,2555 3780,2550 3780,1775 3775,1770 3770,1765 3745,1765 3635,1765 3625,1775 3625,1805 3625,2540
COM-R on Bottom Layer "Top Layer-No Net" (solid, remove dead copper, pour order 1008): 3625,505 3625,1520 3630,1525 3670,1525 3775,1525 3780,1520 3780,1510 3780,490 3775,485 3755,485 3630,485 3625,490

## Keep-outs
Keep-Out Layer:
  circle w7.87: c4133.86,3740.16 r82.68
  circle w7.87: c4133.86,196.85 r82.68
  circle w7.87: c196.85,3740.16 r62.99
  circle w7.87: c196.85,196.85 r62.99
  lines w7.87: -196.85,0 4527.56,0 4527.56,4330.71 -196.85,4330.71 -196.85,0

## Other copper
Top Layer:
  rectangle net VCC-24V-MD: 3025,1535 3145,1595
  rectangle net VCC-24V-MD: 3165,2685 3220,2785
  rectangle net VCC-3.3V-MD: 1680,1275 1773.14,1370
  region net VCC-5V-MD: 1920.06,1522.59 1954.71,1499.49 1965.8,1516.13 1931.15,1539.23
  region net MOT-L-Y: 3400,2059.05 3400,2084.05 3370,2084.05 3370,2059.05
  region net MOT-L-G: 3405,2389.05 3405,2414.05 3375,2414.05 3375,2389.05
  region net MOT-L-G: 3490,2344.05 3490,2414.05 3385,2414.05 3385,2344.05
  region net MOT-R-Y: 3405,669.06 3405,694.06 3375,694.06 3375,669.06
  region net MOT-R-G: 3405,999.06 3405,1024.06 3375,1024.06 3375,999.06
  region net MOT-R-Y: 3490,624.06 3490,694.06 3385,694.06 3385,624.06
  region net MOT-R-G: 3490,954.06 3490,1024.06 3385,1024.06 3385,954.06
  region net MOT-L-Y: 3490,2014.05 3490,2084.05 3385,2084.05 3385,2014.05
  region net MOT-R-B: 3490,1284.05 3490,1354.05 3385,1354.05 3385,1284.05
  region net MOT-R-B: 3405,1329.05 3405,1354.05 3375,1354.05 3375,1329.05
  region net MOT-R-G: 4215,1450 4253.89,1488.89 4236.21,1506.57 4197.32,1467.68
  rectangle net VCC-24V-HW: 462.44,3391.56 523.44,3492.56
  rectangle net VCC-24V-HW: 772.44,3391.56 833.44,3492.56
  rectangle net VCC-24V-HW: 1727.44,3391.56 1788.44,3492.56
  rectangle net VCC-24V-HW: 2042.44,3391.56 2103.44,3492.56
  rectangle net VCC-24V-HW: 2357.44,3391.56 2418.44,3492.56
  rectangle net VCC-24V-HW: 2667.44,3391.56 2728.44,3492.56
  pour cut-out: 715,2655 715,2585 855,2585 855,2655
  pour cut-out: 870,2660 870,2585 1000,2585 1000,2660
  pour cut-out: 1320,2660 1320,2585 1410,2585 1410,2660
  pour cut-out: 425,2955 425,2880 615,2880 615,2955
  pour cut-out: 835,1345 870,1345 870,1450 835,1450

## Silkscreen, mask and mechanical layers (free items; w line width, h text height)
Top Overlay:
  circle w7.87: c196.85,3740.16 r118.11
  circle w7.87: c196.85,196.85 r118.11
  circle w7.87: c4133.86,196.85 r118.11
  circle w7.87: c4133.86,3740.16 r118.11
  lines w5: 575,3085 595,3105 595,3205 575,3225 ; 625,3085 615,3095 615,3220 625,3230 ; 880,3230 915,3195 915,3110 885,3080 ; 940,3085 930,3095 930,3270 945,3285 ; 1075,3225 1090,3210 1090,3060 1080,3050 ; 1405,3055 1405,3270 1425,3290 ; 1520,3055 1520,3080 ; 1560,3385 1570,3395 1570,3485 ; 1570,3085 1570,3220 1580,3230 ; 1830,3230 1855,3205 1855,3105 1835,3085 ; 1875,3085 1875,3245 1890,3260 ; 1945,2135 1955,2125 2195,2125 2240,2080 2240,1605 2220,1585 ; 2140,3085 2165,3110 2165,3210 2150,3225 ; 2190,3085 2190,3230 2205,3245 ; 2455,3085 2460,3090 2475,3105 2475,3210 2460,3225 ; 2500,3090 2500,3230 2515,3245 ; 3090,3280 3075,3295 3075,3405 3075,3410 3090,3425 ; 3270,3285 3255,3300 3255,3410 3275,3430 ; 4015,3505 4230,3505 4265,3470 4265,3255 4250,3240 4235,3240 ; 4190,2735 4220,2735 4265,2780 4265,3000 4235,3030
  lines w7.87: 2225,365 2255,335 2255,305 ; 2720,1380 2740,1360 2740,1245 ; 2780,1575 2760,1555 2760,1290 2775,1275 2905,1275 2945,1315
  text "MotorControl_V5.0" at 3245,4210 h60

## Text inside footprints (layer, text, board x,y; h text height)
LOGO1: Top Overlay "EVOLVER" at 4129,3881 h45